# EAGLE board Iridium_9603_Beacon (EAGLE 9.0.0)
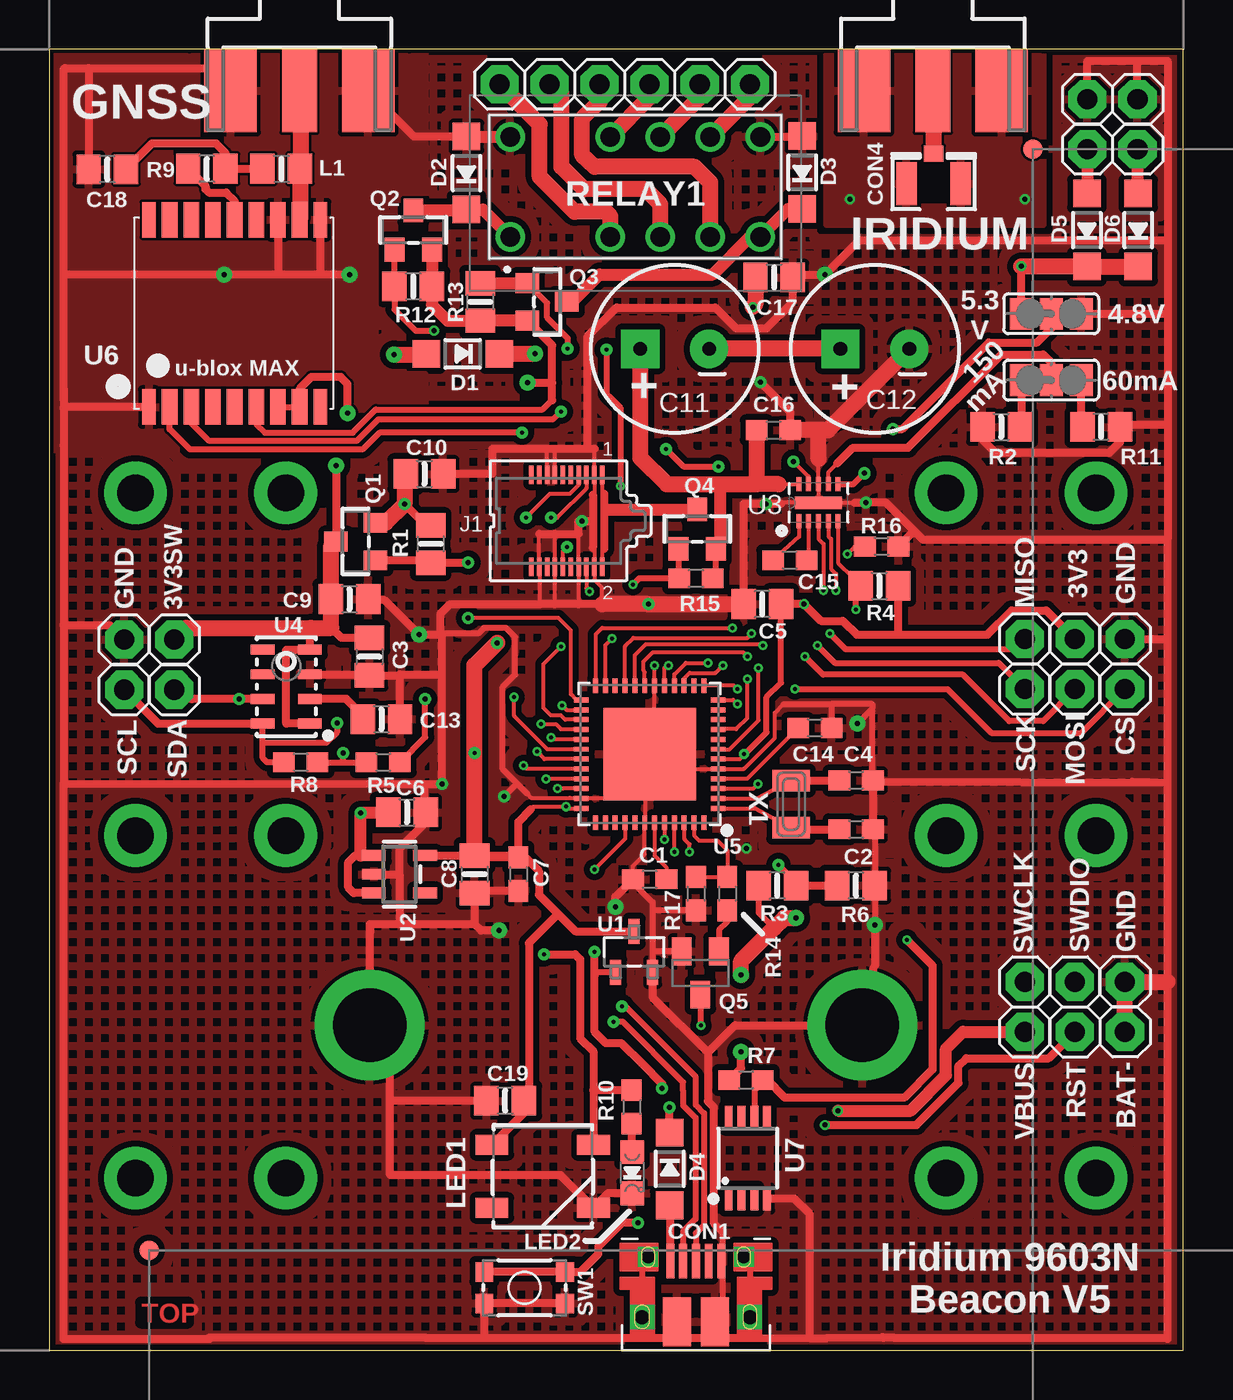
[diagram p0: board, top side]
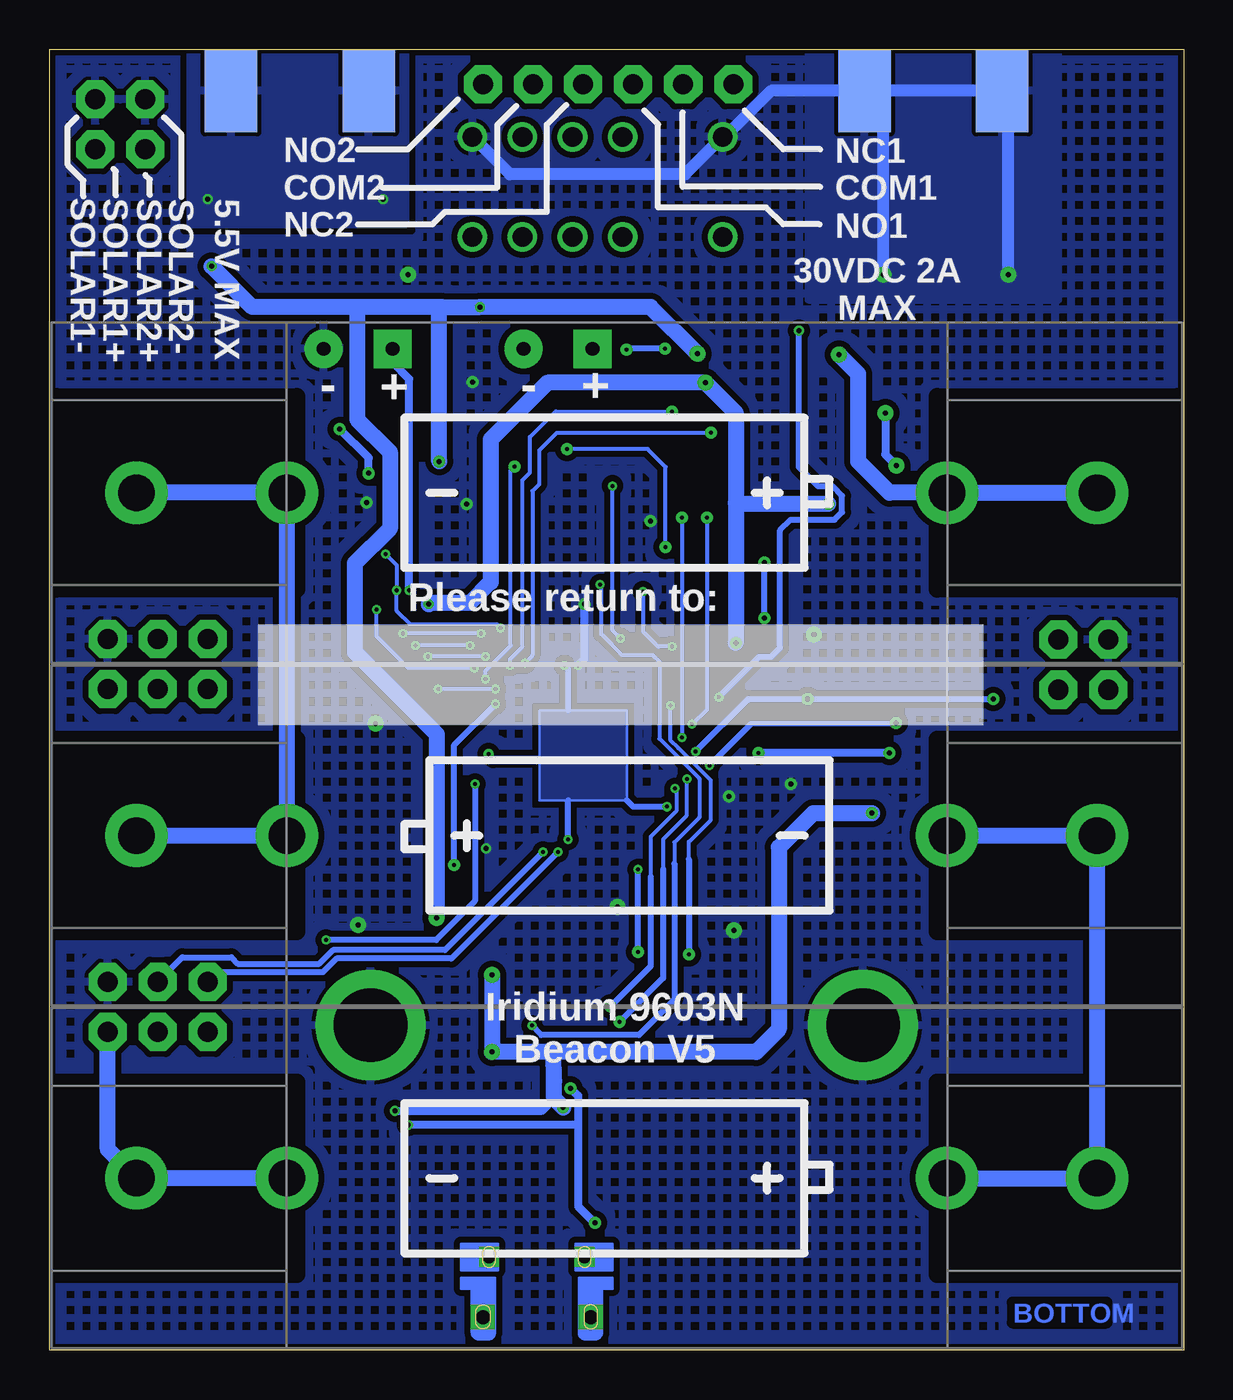
[diagram p1: board, bottom side, seen from below]

Size 57.56 x 66.04 mm. Coordinates in mm from the lower left corner, seen from the top.
Outline: 0,0 57.56,0 57.56,66.04 0,66.04 0,0
Copper layers (1*16): Top 0.018mm / dielectric 1.55mm / Bottom 0.018mm
Design rules "Multi-CB_2L_125um-Tracks_OL35um *": minimum track width 0.125mm, minimum drill 0.2mm, track to track 0.125mm, track to pad 0.125mm, pad to pad 0.125mm, via to via 0.125mm, smd to smd 0mil, copper to edge 0.2mm, drill to drill 0.2mm, minimum pad ring 0.125mm, minimum via ring 0.125mm, stop-mask expansion 2mil, vias tented up to drill 0.45mm, thermal gap 0.2mm

## Footprints (pad centres in the part's own frame; a part is rotated, then mirrored left to right if it is on the bottom)
1X01 = drill 1.016 pad 1.93 octagon: 1 0,0
BATTERY-AAA-KEYSTONE92 = drill 1.854 pad 3.175: GND@1 24.384,0; GND@2 16.764,0; PWR@1 -24.384,0; PWR@2 -16.764,0
0603-NO = smd 1.1 x 1: 1 -0.85,0; 2 0.85,0
0805-NO = smd 1.24 x 1.5: 1 -0.95,0; 2 0.95,0
CPOL-RADIAL-1F-2.7V = drill 0.7 pad 1.93 square: + 1.75,0 | drill 0.7 pad 1.93: - -1.75,0
FCI_10103594 = smd 1.425 x 2.5: BASE@1 -0.963,1.45; BASE@2 0.963,1.45 | smd 0.4 x 1.75: D+ 0,4.525; D- -0.65,4.525; GND 1.3,4.525; ID 0.65,4.525; VBUS -1.3,4.525 | drill 0.7 pad 1.25 square: SPRT@1 -2.736,1.679; SPRT@2 2.736,1.679 | drill 0.65 pad 1.016 square: SPRT@3 -2.426,4.747; SPRT@4 2.426,4.747
U.FL = smd 2.2 x 1.05: 1 0,1.375; 2 0,-1.375 | smd 0.8 x 1: 3 1.525,0
SOD-123 = smd 1.4 x 1.4: A 1.85,0; C -1.85,0
FIDUCIAL-1X2 = smd 1 x 1: 1 0,0
J502-ND-142-0711-821/826 = smd 4.191 x 1.778: 1 2.115,0 | smd 4.191 x 2.667: G@1 2.115,3.495; G@2 2.115,-3.495 | smd 4.191 x 2.667 bottom: G@3 2.115,3.495; G@4 2.115,-3.495
SS4-10-3.50-X-D = smd 0.23 x 0.93: 1 1.8,2.335; 2 1.8,-2.335; 3 1.4,2.335; 4 1.4,-2.335; 5 1,2.335; 6 1,-2.335; 7 0.6,2.335; 8 0.6,-2.335; 9 0.2,2.335; 10 0.2,-2.335; 11 -0.2,2.335; 12 -0.2,-2.335; 13 -0.6,2.335; 14 -0.6,-2.335; 15 -1,2.335; 16 -1,-2.335; 17 -1.4,2.335; 18 -1.4,-2.335; 19 -1.8,2.335; 20 -1.8,-2.335
PAD-JUMPER-3-2OF3_NC_BY_TRACE_YES_SILK_LARGE = smd 1.168 x 1.6: 1 -1.524,0; 2 0,0; 3 1.524,0
WS2812B = smd 1.651 x 1: 1 -2.577,1.6; 2 -2.577,-1.6; 3 2.577,-1.6; 4 2.577,1.6
CHIPLED_0805_NOOUTLINE = smd 1.2 x 1.2: A 0,-1.05; C 0,1.05
SOT23-WIDE = smd 1 x 1.2: 1 -0.95,-1; 2 0.95,-1; 3 0,1
SOT23-BEC = smd 1 x 1.4: B -0.95,-1.1; C 0,1.1; E 0.95,-1.1
G6SK2DC5 = drill 1 pad 1.5: 1 -6.35,-2.54; 3 -1.27,-2.54; 4 1.27,-2.54; 5 3.81,-2.54; 6 6.35,-2.54; 7 6.35,2.54; 8 3.81,2.54; 9 1.27,2.54; 10 -1.27,2.54; 12 -6.35,2.54
STANDOFF-ELECTRICAL-MCMASTER-95117A411 = drill 3.734 pad 5.588: P1 0,0
TACTILE_SWITCH_SMD_4.6X2.8MM = smd 0.9 x 1: 1 -2.05,-0.8; 2 2.05,-0.8; 3 2.05,0.8; 4 -2.05,0.8
SOT95P237X112-3N = smd 0.559 x 1.27: 1 -0.94,-1.041; 2 0.94,-1.041; 3 0,1.041
SOT23-5 = smd 0.55 x 1.2: 1 -0.95,-1.3; 2 0,-1.3; 3 0.95,-1.3; 4 0.95,1.3; 5 -0.95,1.3
DFN300X200-10L = smd 0.711 x 0.254: 1 -0.94,0.991; 2 -0.94,0.508; 3 -0.94,0; 4 -0.94,-0.508; 5 -0.94,-0.991; 6 0.94,-0.991; 7 0.94,-0.508; 8 0.94,0; 9 0.94,0.508; 10 0.94,0.991 | smd 0.635 x 2.388: 11 0,0
LGA8 = smd 1.2 x 0.5: 1 -1.2,1.875; 2 -1.2,0.625; 3 -1.2,-0.625; 4 -1.2,-1.875; 5 1.2,-1.875; 6 1.2,-0.625; 7 1.2,0.625; 8 1.2,1.875
TQFN48_7MM = smd 0.25 x 0.75: 1 -2.75,-3.475; 2 -2.25,-3.475; 3 -1.75,-3.475; 4 -1.25,-3.475; 5 -0.75,-3.475; 6 -0.25,-3.475; 7 0.25,-3.475; 8 0.75,-3.475; 9 1.25,-3.475; 10 1.75,-3.475; 11 2.25,-3.475; 12 2.75,-3.475; 25 2.75,3.475; 26 2.25,3.475; 27 1.75,3.475; 28 1.25,3.475; 29 0.75,3.475; 30 0.25,3.475; 31 -0.25,3.475; 32 -0.75,3.475; 33 -1.25,3.475; 34 -1.75,3.475; 35 -2.25,3.475; 36 -2.75,3.475 | smd 0.75 x 0.25: 13 3.475,-2.75; 14 3.475,-2.25; 15 3.475,-1.75; 16 3.475,-1.25; 17 3.475,-0.75; 18 3.475,-0.25; 19 3.475,0.25; 20 3.475,0.75; 21 3.475,1.25; 22 3.475,1.75; 23 3.475,2.25; 24 3.475,2.75; 37 -3.475,2.75; 38 -3.475,2.25; 39 -3.475,1.75; 40 -3.475,1.25; 41 -3.475,0.75; 42 -3.475,0.25; 43 -3.475,-0.25; 44 -3.475,-0.75; 45 -3.475,-1.25; 46 -3.475,-1.75; 47 -3.475,-2.25; 48 -3.475,-2.75 | smd 4.7 x 4.7: THERMAL 0,0
MAX-M8 = smd 1.8 x 0.7: 1_GND 4.95,-4.4; 9_RESET_N 4.95,4.3; 10_GND -4.55,4.3; 18_SAFEBOOT_N -4.55,-4.4 | smd 1.8 x 0.8: 2_TXD 4.95,-3.35; 3_RXD 4.95,-2.25; 4_TIMEPULSE 4.95,-1.15; 5_EXTINT 4.95,-0.05; 6_V_BCKP 4.95,1.05; 7_VCC_IO 4.95,2.15; 8_VCC 4.95,3.25; 11_RF_IN -4.55,3.25; 12_GND -4.55,2.15; 13_LNA_EN -4.55,1.05; 14_VCC_RF -4.55,-0.05; 15_V_ANT/RESERVED -4.55,-1.15; 16_SDA -4.55,-2.25; 17_SCL -4.55,-3.35
MSOP8 = smd 0.4 x 1.2: 1 -0.975,-2.05; 2 -0.325,-2.05; 3 0.325,-2.05; 4 0.975,-2.05; 5 0.975,2.05; 6 0.325,2.05; 7 -0.325,2.05; 8 -0.975,2.05
XTAL3215 = smd 1.1 x 1.9: P$1 1.2,0; P$2 -1.2,0

## Placement (x,y rotation side)
3V3  [1X01]  52.07,36.1 270 top
3V3SW  [1X01]  6.35,36.07 90 top
BAT1  [BATTERY-AAA-KEYSTONE92]  28.77,43.53 180 bottom
BAT2  [BATTERY-AAA-KEYSTONE92]  28.77,26.13 0 bottom
BAT3  [BATTERY-AAA-KEYSTONE92]  28.77,8.73 180 bottom
BAT-  [1X01]  54.61,16.16 0 top
C1  1uF  [0603-NO]  30.48,23.91 180 top
C2  22pF  [0603-NO]  40.96,26.45 0 top
C3  10uF  [0805-NO]  16.26,35.21 270 top
C4  22pF  [0603-NO]  40.96,28.92 0 top
C5  10uF  [0805-NO]  36.2,37.88 180 top
C6  10µF  [0805-NO]  18.16,27.3 0 top
C7  1uF  [0603-NO]  23.81,24.16 270 top
C8  10µF  [0805-NO]  21.59,24.16 270 top
C9  0.1uF  [0805-NO]  15.24,38.13 0 top
C10  10uF  [0805-NO]  19.05,44.48 0 top
C11  1F 2.7V  [CPOL-RADIAL-1F-2.7V]  31.75,50.83 180 top
C12  1F 2.7V  [CPOL-RADIAL-1F-2.7V]  41.91,50.83 180 top
C13  0.1uF  [0805-NO]  16.86,32.04 0 top
C14  1uF  [0603-NO]  38.86,31.59 0 top
C15  1uF  [0603-NO]  37.59,40.1 0 top
C16  0.22uF  [0603-NO]  36.77,46.7 0 top
C17  2.2uF  [0805-NO]  36.8,54.45 0 top
C18  10nF  [0805-NO]  2.95,59.94 180 top
C19  10uF  [0805-NO]  23.15,12.67 180 top
COM1  [1X01]  25.4,64.26 0 top
COM2  [1X01]  33.02,64.26 0 top
CON1  [FCI_10103594]  32.83,0 0 top
CON4  uFL  [U.FL]  44.89,59.21 90 top
CS  [1X01]  54.61,33.56 90 top
D1  MBR120  [SOD-123]  20.99,50.58 180 top
D2  MBR120  [SOD-123]  21.18,59.75 90 top
D3  MBR120  [SOD-123]  38.23,59.79 90 top
D4  MBR120  [SOD-123]  31.5,9.21 270 top
D5  MBR120  [SOD-123]  52.67,56.86 90 top
D6  MBR120  [SOD-123]  55.28,56.86 90 top
FD1  FIDUCIAL1X2  [FIDUCIAL-1X2]  5.08,5.08 0 top
FD2  FIDUCIAL1X2  [FIDUCIAL-1X2]  49.94,60.96 0 top
GND  [1X01]  54.61,18.7 270 top
GND2  [1X01]  54.61,36.1 270 top
GND3  [1X01]  3.81,36.07 90 top
GNSS  SMA-142-0711-821/826  [J502-ND-142-0711-821/826]  12.7,66.04 270 top
IRIDIUM  SMA-142-0711-821/826  [J502-ND-142-0711-821/826]  44.86,66.04 270 top
J1  SS4-10-3.50-X-D  [SS4-10-3.50-X-D]  26.27,42.1 0 top
JP1  [PAD-JUMPER-3-2OF3_NC_BY_TRACE_YES_SILK_LARGE]  50.86,52.61 180 top
JP2  [PAD-JUMPER-3-2OF3_NC_BY_TRACE_YES_SILK_LARGE]  50.86,49.24 180 top
L1  33nH  [0805-NO]  11.78,59.98 0 top
LED1  [WS2812B]  25.05,8.83 0 top
LED2  RED  [CHIPLED_0805_NOOUTLINE]  29.59,9.02 180 top
MISO  [1X01]  49.53,36.1 270 top
MOSI  [1X01]  52.07,33.56 90 top
NC1  [1X01]  22.86,64.26 0 top
NC2  [1X01]  30.48,64.26 0 top
NO1  [1X01]  27.94,64.26 0 top
NO2  [1X01]  35.56,64.26 0 top
Q1  DMG3415U-7  [SOT23-WIDE]  15.56,41.05 90 top
Q2  DMG3415U-7  [SOT23-WIDE]  18.48,56.86 0 top
Q3  DMG3415U-7  [SOT23-WIDE]  25.27,53.21 270 top
Q4  DMG3415U-7  [SOT23-WIDE]  32.89,41.69 0 top
Q5  2N2222  [SOT23-BEC]  33.05,19.15 180 top
R1  100K  [0805-NO]  19.37,40.93 270 top
R2  12K  [0805-NO]  48.32,46.86 0 top
R3  100K  [0805-NO]  36.96,23.59 180 top
R4  100K  [0805-NO]  42.13,38.8 0 top
R5  1K  [0603-NO]  16.95,29.84 0 top
R6  100K  [0805-NO]  40.96,23.59 180 top
R7  47k  [0603-NO]  35.37,13.72 0 top
R8  1K  [0603-NO]  12.76,29.84 180 top
R9  10 ohm  [0805-NO]  8,59.98 180 top
R10  2.2K  [0603-NO]  29.56,12.35 270 top
R11  30K  [0805-NO]  53.4,46.86 180 top
R12  100K  [0805-NO]  18.48,54.01 0 top
R13  100K  [0805-NO]  21.88,53.21 270 top
R14  1K  [0603-NO]  34.42,23.18 270 top
R15  10K  [0603-NO]  32.83,39.18 180 top
R16  10K  [0603-NO]  42.26,40.8 0 top
R17  10K  [0603-NO]  32.83,23.18 270 top
RELAY1  G6SK-2_DC5  [G6SK2DC5]  29.75,59.05 0 top
RST  [1X01]  52.07,16.16 90 top
S1  STANDOFF_ELECTRICALMCMASTER-95117A411  [STANDOFF-ELECTRICAL-MCMASTER-95117A411]  16.27,16.5 0 top
S2  STANDOFF_ELECTRICALMCMASTER-95117A411  [STANDOFF-ELECTRICAL-MCMASTER-95117A411]  41.27,16.5 0 top
SCK  [1X01]  49.53,33.56 90 top
SCL  [1X01]  3.81,33.53 270 top
SDA  [1X01]  6.35,33.53 270 top
SOLAR1+  [1X01]  55.24,60.96 0 top
SOLAR1-  [1X01]  55.24,63.5 0 top
SOLAR2+  [1X01]  52.7,60.96 0 top
SOLAR2-  [1X01]  52.7,63.5 0 top
SW1  [TACTILE_SWITCH_SMD_4.6X2.8MM]  24.13,3.17 180 top
SWCLK  [1X01]  49.53,18.7 90 top
SWDIO  [1X01]  52.07,18.7 90 top
U1  MCP111T-240E/TT  [SOT95P237X112-3N]  29.69,20.22 0 top
U2  SPX3819-3.3  [SOT23-5]  17.78,24.16 270 top
U3  LTC3225EDDB#TRMPBF  [DFN300X200-10L]  39.05,43.02 90 top
U4  MPL3115A2LGA8  [LGA8]  12.03,33.69 180 top
U5  ATSAMD21G18_QFN  [TQFN48_7MM]  30.48,30.26 90 top
U6  MAX-M8  [MAX-M8]  9.46,52.83 270 top
U7  LT1634-1,25BMCMS8  [MSOP8]  35.46,9.75 0 top
VBUS  [1X01]  49.53,16.16 90 top
X1  32.768  [XTAL3215]  37.66,27.72 270 top

## Library data of the parts
3V3 3V3SW BAT- COM1 COM2 CS GND GND2 GND3 MISO MOSI NC1 NC2 NO1 NO2 RST SCK SCL SDA SOLAR1+ SOLAR1- SOLAR2+ SOLAR2- SWCLK SWDIO VBUS = adafruit
BAT1-BAT3 S1 S2 = SparkFun-Electromechanical
C1-C10 C13-C19 CON1 CON4 D1-D6 L1 LED2 Q1-Q4 R1-R17 U2 U5 = microbuilder
C11 C12 = SparkFun-Capacitors
FD1 FD2 = SparkFun-Aesthetics
GNSS IRIDIUM = con-coax; MF: JOHNSON COMPONENTS; MPN: 142-0711-821; OC_FARNELL: 1019328; OC_NEWARK: 16F3627
J1 = SS4-10-3.50-X-D
JP1 JP2 = SparkFun-Passives
LED1 = SparkFun-LED; PROD_ID: DIO-12503
Q5 = transistor
RELAY1 = G6SK-2_DC5; DESCRIPTION: RELAY TELECOM DPDT 2A 5V; HEIGHT: 9mm; MANUFACTURER_NAME: Omron Electronics; MANUFACTURER_PART_NUMBER: G6SK-2 DC5
SW1 = SparkFun-Electromechanical; PROD_ID: SWCH-13065
U1 = Microchip-MCP11; MPN: MCP111T-240E/TT; OC_FARNELL: 1851877; OC_NEWARK: 56J7328; PACKAGE: SOT23-3; SUPPLIER: MICROCHIP
U3 = LTC_By_element14_Batch_1
U4 = SparkFun-Sensors; PROD_ID: IC-10869
U6 = ubloxLib
U7 = linear-technology
X1 = adafruit2

## Nets
3V3SW: 3V3SW.1 C3.1 C9.1 Q1.3 U4.1 U4.4 U6.7_VCC_IO U6.8_VCC
9_V_RESET_N: U6.9_RESET_N
!RESET: RST.1 SW1.1 SW1.2 U1.1 U5.40
+3V3: 3V3.1 C5.1 C7.1 C8.1 C10.1 C19.1 LED1.1 Q1.2 Q2.2 Q3.2 R1.1 R4.2 R5.1 R8.1 R12.2 R13.2 U1.3 U2.5 U5.6 U5.17 U5.36 U5.44 U6.6_V_BCKP
A0: R7.2 U5.3 U7.6
A1: R4.1 U3.5 U5.7
A2: U5.8
A3: J1.12 U5.9
A4: U5.10
A5: R14.1 R17.1 U5.47
AREF: C14.1 U5.4
D0: U5.16 U6.2_TXD
D1: U5.15 U6.3_RXD
D2: Q3.1 R13.1 U5.23
D3: U5.14
D5: R16.1 U3.4 U5.24
D6: J1.5 U5.29
D7: Q2.1 R12.1 U5.30
D8: U5.11
D9: R3.1 R6.2 U5.12
D10: J1.6 U5.27
D11: Q1.1 R1.2 U5.25
D12: J1.7 U5.28
D13: LED1.4 R10.1 U5.26
D+: CON1.D+ U5.34
D-: CON1.D- U5.33
EXT_PWR: J1.1 J1.2 Q4.3
GND: C1.2 C2.2 C3.2 C4.2 C5.2 C6.2 C7.2 C8.2 C9.2 C10.2 C12.- C13.2 C14.2 C16.2 C17.2 C18.2 C19.2 CON1.BASE@1 CON1.BASE@2 CON1.GND CON1.SPRT@1 CON1.SPRT@2 CON1.SPRT@3 CON1.SPRT@4 D2.A D3.A GND2.1 GND3.1 GND.1 GNSS.G@1 GNSS.G@2 GNSS.G@3 GNSS.G@4 J1.3 J1.4 J1.8 J1.13 J1.14 J1.15 J1.18 JP1.1 LED1.3 LED2.C Q5.E R2.1 R6.1 R11.1 R16.2 R17.2 RELAY1.7 RELAY1.12 S1.P1 S2.P1 SOLAR1-.1 SOLAR2-.1 SW1.3 SW1.4 U1.2 U2.2 U3.8 U3.11 U4.3 U5.5 U5.18 U5.35 U5.42 U5.THERMAL U6.1_GND U6.10_GND U6.12_GND U7.4
GNDA: CON4.1 CON4.2 IRIDIUM.G@1 IRIDIUM.G@2 IRIDIUM.G@3 IRIDIUM.G@4
GPS_ANT: GNSS.1 L1.2 U6.11_RF_IN
LTC3225_VOUT: C11.+ C16.1 Q4.2 R15.1 U3.10
MISO: MISO.1 U5.21
MOSI: MOSI.1 U5.19
N$1: C18.1 L1.1 R9.1
N$2: CON4.3 IRIDIUM.1
N$3: LED2.A R10.2
N$4: D6.A SOLAR1+.1
N$5: C2.1 U5.1 X1.P$1
N$6: C11.- C12.+ U3.3
N$7: C4.1 U5.2 X1.P$2
N$8: BAT1.GND@1 BAT1.GND@2 BAT2.PWR@1 BAT2.PWR@2
N$9: C15.2 U3.2
N$10: C15.1 U3.1
N$11: JP2.2 U3.7
N$12: C13.1 U4.2
N$13: JP1.2 U3.6
N$14: D5.A SOLAR2+.1
N$15: BAT3.GND@1 BAT3.GND@2 BAT-.1
N$16: CON1.VBUS D4.A
N$17: JP2.3 R2.2
N$18: JP2.1 R11.2
N$19: Q4.1 Q5.C R15.2
N$20: Q5.B R14.2
N$21: BAT2.GND@1 BAT2.GND@2 BAT3.PWR@1 BAT3.PWR@2
N$23: NC1.1 RELAY1.3
N$24: COM1.1 RELAY1.4
N$25: NO1.1 RELAY1.5
N$26: NO2.1 RELAY1.8
N$27: COM2.1 RELAY1.9
N$28: NC2.1 RELAY1.10
RESET_RELAY: D3.C Q3.3 RELAY1.6
SCK: SCK.1 U5.20
SCL: R8.2 SCL.1 U4.8 U5.32
SD_CS: CS.1 U5.13
SDA: R5.2 SDA.1 U4.7 U5.31
SET_RELAY: D2.C Q2.3 RELAY1.1
SWCLK: SWCLK.1 U5.45
SWDIO: SWDIO.1 U5.46
VBAT: BAT1.PWR@1 BAT1.PWR@2 D1.A
VBUS: C6.1 C17.1 D1.C D4.C D5.C D6.C JP1.3 R3.2 R7.1 U2.1 U2.3 U3.9 VBUS.1
VCC_RF: R9.2 U6.14_VCC_RF
VDDCORE1: C1.1 U5.43

## Tracks (layer width: path | path; a pad name or v marks a point on that pad's centre or on a via)
3V3SW  (via drill 0.25 pad 0.81)
  Top 0.305: U6.7_VCC_IO U6.8_VCC
  Top 0.406: U4.1 12.03,31.81 12.03,35.56 U4.4 13.23,36.63 13.27,36.67 | C9.1 14.54,38.13 | v15.14,47.56 15.14,49.05 14.8,49.4 13.3,49.4 12.71,48.81 U6.8_VCC | v14.57,44.9 14.57,41.07 Q1.3 | C3.1 14.83,36.16 14.32,36.67
  Top 0.813: 14.24,38.18 C9.1 | Q1.3 14.29,40.78 C9.1 | 3V3SW.1 6.95,36.67 13.27,36.67 14.32,36.67 14.32,38.1 C9.1
  Bottom 0.406: v15.14,47.56 15.14,45.47 v14.57,44.9
!RESET  (via drill 0.2 pad 0.46, 0.2 pad 0.61, 0.25, 0.25 pad 0.61)
  Top 0.203: U5.40 29.23,25.96 v27.69,24.42
  Top 0.305: U1.1 27.82,19.18 27.69,19.05
  Top 0.406: SW1.2 SW1.1 26.96,3.98 27.88,4.89 27.88,5.27 29.08,6.48 v29.88,6.48 | 27.65,20.19 v27.69,20.23 27.69,19.05 27.69,16.16 28.26,15.59 29.05,15.59 30.09,14.56 31.11,13.53 v31.11,13.3 | v39.37,11.43 44.02,11.43 46.16,13.57 46.16,14.44 46.55,14.83 50.74,14.83 RST.1
  Bottom 0.305: v27.69,20.23 v27.69,24.42
  Bottom 0.406: v31.11,13.3 30.73,12.92 30.73,11.43 | 30.73,11.43 30.73,7.3 29.91,6.48 v29.88,6.48 | 30.73,11.43 v39.37,11.43
+3V3  (via drill 0.2 pad 0.46, 0.2 pad 0.51, 0.2 pad 0.61, 0.25 pad 0.41, 0.25 pad 0.61, 0.25 pad 0.81)
  Top 0.127: U5.36 26.96,27.46 | U5.44 31.24,26.77 | 24.45,27.46 24.57,27.59
  Top 0.203: U5.17 31.23,34.63 v31.43,34.77 | 31.24,26.77 v31.24,25.94 | 24.57,27.59 v26.23,27.59 26.31,27.51 U5.36 | C5.1 | U5.6 35.06,30.01 35.27,30.23 v35.27,30.26
  Top 0.305: C5.1 37.15,33.88 36.42,33.15 36.42,31.37 35.31,30.26 v35.27,30.26 | R5.1 R8.1 14.92,29.84 v14.92,30.32 | U6.6_V_BCKP 10.51,47.02 10.95,46.58 15.4,46.58 16.57,47.75 25.05,47.75 25.53,48.23
  Top 0.406: 24.45,27.46 23.81,26.83 C7.1 21.59,25.01 C8.1 U2.5 24.07,25.11 24.86,24.32 24.86,23.11 25.83,22.15 | 38.26,37.88 C5.1 | 25.83,22.15 26.71,21.27 U1.3 | 25.83,22.15 24.35,20.67 24.35,12.93 C19.1 24.1,12.05 LED1.1 | Q3.2 25.53,51.01 25.53,49.12 | R1.1 19.12,41.88 v18.03,42.96 | v38.32,37.88 39.17,37.02 40.29,37.02 40.99,36.32 43.18,36.32 | 3V3.1 50.61,37.56 48.86,37.56 47.62,36.32 43.18,36.32 | v24.28,49.12 25.53,49.12 | 25.53,48.23 25.53,49.12 | R4.2 43.08,36.42 43.18,36.32
  Top 0.61: Q2.2 R12.2 19.43,53.06 20.22,52.26 R13.2 Q3.2
  Top 0.813: C8.1 v21.59,30.32 21.59,34.77 v22.73,35.91 | Q1.2 17.08,42 v18.03,42.96 18.03,44.42 C10.1
  Bottom 0.127: 31.23,32.48 28.26,32.48 28.26,27.91 31.24,27.91 32.7,27.91 32.7,30 32.7,32.48 31.24,32.48 31.23,32.48 | 31.23,32.48 U5.17
  Bottom 0.305: 32.7,30 35.05,30 35.27,30.23 v35.27,30.26 | v31.24,25.94 31.24,27.91 | 28.26,27.91 27.94,27.59 v26.23,27.59 | v31.43,34.77 31.24,34.58 31.24,32.48
  Bottom 0.406: v14.92,30.32 v21.59,30.32
  Bottom 0.813: v38.32,37.88 38.26,37.94 36.23,37.94 35.18,38.99 35.18,46.23 32.29,49.12 v24.28,49.12 22.73,47.57 22.73,43.02 | 22.73,43.02 v22.73,35.91 | 22.73,43.02 22.67,42.96 v18.03,42.96
  pour Bottom: 28.26,32.48 32.7,32.48 32.7,27.91 28.26,27.91
A0  (via drill 0.2 pad 0.46)
  Top 0.125: 35.8,11.82 U7.6 | 36.17,13.57 R7.2
  Top 0.203: U5.3 35.75,28.51 v35.97,28.73
  Top 0.305: 36.45,13.72 R7.2 | 35.8,11.82 35.8,13.19 36.17,13.57
  Top 0.406: 36.45,13.72 37.34,12.82 43.41,12.82 44.84,14.26 44.83,19.53 v43.53,20.83
  Bottom 0.305: v35.97,28.73 35.97,22.8 37.94,20.83 v43.53,20.83
A1  (via drill 0.2 pad 0.46)
  Top 0.203: U3.5 40.04,39.97 40.77,39.24 40.96,39.24 41.18,39.02 R4.1 | U5.7 34.54,30.51 36.01,31.97 v36.01,34.64
  Top 0.305: v40.96,37.59 40.96,38.57 R4.1
  Bottom 0.203: v36.01,34.64 39.37,34.64 40.96,36.23 v40.96,37.59
A3  (via drill 0.2 pad 0.46, 0.2 pad 0.61)
  Top 0.127: 33.98,31.53 U5.9
  Top 0.203: 33.98,31.53 34.86,31.53 35.43,32.1 v35.43,34.07 | J1.12 26.07,40.55 v26.29,40.77
  Top 0.305: v31.3,45.75 32.19,44.86 v33.97,44.86
  Bottom 0.203: v31.3,45.75 27.21,45.75 26.29,44.83 v26.29,40.77 | v35.43,34.07 35.43,34.51 34.16,35.78 34.16,44.67 v33.97,44.86
A5
  Top 0.203: U5.47 32.73,26.13 32.99,25.88 33.91,25.88 34.42,25.37 R14.1 R17.1
AREF
  Top 0.203: U5.4 35.43,29.01 C14.1
D0  (via drill 0.2 pad 0.46, 0.2 pad 0.61)
  Top 0.203: U5.16 31.73,34.3 32.32,34.89 v33.43,34.89
  Top 0.305: v24,46.58 16.76,46.58 15.91,45.72 7.14,45.72 6.11,46.75 U6.2_TXD
  Bottom 0.203: v24,46.58 31.81,46.58 32.7,45.69 32.7,43.97 33.05,43.62 33.05,35.27 v33.43,34.89
D1  (via drill 0.2 pad 0.46, 0.2 pad 0.61)
  Top 0.127: 32.23,34.1 U5.15
  Top 0.203: 32.23,34.1 32.51,34.38 33.81,34.38 v34.2,34.77
  Top 0.305: U6.3_RXD 7.21,47.07 8.13,46.15 15.61,46.15 16.7,47.24 25.56,47.24 v25.97,47.66
  Bottom 0.203: v25.97,47.66 31.88,47.66 33.18,46.35 33.18,44.55 33.56,44.16 33.56,35.72 34.2,35.08 v34.2,34.77
D2  (via drill 0.2 pad 0.46, 0.2 pad 0.61)
  Top 0.203: U5.23 28.23,35.79 v28.57,36.13
  Top 0.305: Q3.1 25.27,53.16 25.27,52.42 26.32,51.37 v26.32,50.83 | v28.29,50.8 28.29,48.55 28.48,48.35 28.99,47.85 v28.99,43.88
  Top 0.61: R13.1 Q3.1
  Bottom 0.203: v28.57,36.13 28.99,36.54 v28.99,43.88
  Bottom 0.305: v26.32,50.83 28.26,50.83 v28.29,50.8
D5  (via drill 0.2 pad 0.46)
  Top 0.127: 27.75,33.75 U5.24
  Top 0.203: U3.4 39.56,41.31 39.69,41.18 39.69,39.66 39.94,39.4 v39.94,38.58 | 27.75,33.75 27.75,36.35 28.07,36.67 v34.67,36.67 | R16.1 40.89,40.8 v40.51,40.42
  Bottom 0.203: v40.51,40.42 39.94,39.85 v39.94,38.58 39.94,37.53 39.27,36.86 34.86,36.86 v34.67,36.67
D6  (via drill 0.2 pad 0.46, 0.2 pad 0.61)
  Top 0.127: U5.29
  Top 0.203: J1.5 27.27,43.75 25.78,42.26 v25.46,42.26 | U5.29 25.57,31.01 v25.46,31.11
  Bottom 0.203: v25.46,42.26 v25.46,31.11
D7  (via drill 0.2 pad 0.46, 0.25)
  Top 0.203: U5.30 25.29,30.51 23.6,32.2 v23.6,33.15
  Top 0.305: Q2.1 R12.1 17.53,52.83 18.61,51.75 v19.53,51.75
  Bottom 0.305: v23.6,33.15 21.53,35.21 20.92,35.21 20.48,35.66 20.48,41.62 19.94,42.16 17.72,42.16 17.34,42.55 17.34,43.37 17.81,43.85 18.54,43.85 19.53,44.83 v19.53,51.75
D9  (via drill 0.2 pad 0.46, 0.2 pad 0.61)
  Top 0.203: U5.12 34.72,33.01 v34.92,32.8
  Top 0.305: 37.91,23.97 R3.1 37.91,23.75 v37.02,24.64
  Top 0.406: R3.1 R6.2
  Bottom 0.305: v37.02,24.64 37.02,30.73 v34.92,32.8
D10  (via drill 0.2 pad 0.46)
  Top 0.127: 25.84,35.59 v25.97,35.72
  Top 0.203: U5.27 26.19,32.01 25.97,32.23 25.46,32.23 25.08,32.61 25.08,34.83 v25.97,35.72 | J1.6 27.27,38.67 v27.43,38.51
  Bottom 0.203: v25.97,35.72 26.67,35.72 27.43,36.48 v27.43,38.51
D11  (via drill 0.25 pad 0.61)
  Top 0.127: U5.25 26.78,33.01
  Top 0.203: 26.78,33.01 26.48,33.31 26.48,36.54 25.84,37.18 v21.27,37.18
  Top 0.406: Q1.1 19.24,40.1 R1.2 v21.27,39.98 v21.27,39.97
  Bottom 0.305: v21.27,37.18 v21.27,39.97
D12  (via drill 0.2 pad 0.46, 0.2 pad 0.61)
  Top 0.127: 26.98,31.53 U5.28
  Top 0.203: v24.96,31.78 25.72,31.78 25.97,31.53 26.98,31.53 | J1.7 26.87,43.92 26.42,43.47 25.4,43.47 v24.19,42.26
  Bottom 0.203: v24.19,42.26 24.19,32.51 24.92,31.78 v24.96,31.78
D13  (via drill 0.2 pad 0.46, 0.2 pad 0.61)
  Top 0.203: v26.04,32.73 26.26,32.51 U5.26
  Top 0.406: 27.63,13.21 LED1.4 | R10.1 27.64,13.2 27.63,13.21 | v25.11,20.1 26.7,20.1 26.96,19.84 26.96,15.84 27.63,15.17 27.63,13.21
  Bottom 0.203: 25.11,24.92 25.11,25.81 24,26.92 24,28.92 25.64,30.57 25.65,30.57 26.04,30.95 v26.04,32.73
  Bottom 0.305: 25.11,24.92 v25.11,20.1
D+  (via drill 0.2 pad 0.46, 0.2 pad 0.61)
  Top 0.203: U5.34 26.06,28.51 v25.81,28.51
  Top 0.305: CON1.D+ 32.83,5.94 33.24,6.35 33.24,12.04 32.83,12.45 32.83,13.88 29.24,17.46 v29.08,17.46
  Bottom 0.203: 27.05,24.04 27.05,26.07 25.72,27.4 25.72,28.42 v25.81,28.51
  Bottom 0.305: v29.08,17.46 27.05,19.49 27.05,24.04
D-  (via drill 0.2 pad 0.46, 0.2 pad 0.61)
  Top 0.203: U5.33 25.61,29.01 v25.21,28.99
  Top 0.305: CON1.D- 32.18,6.04 32.81,6.67 32.81,11.8 32.18,12.43 32.18,12.7 32.18,13.16 32.18,13.6 29.11,16.67 v28.64,16.67
  Bottom 0.203: 26.42,24.42 26.42,25.94 25.24,27.11 25.24,28.96 v25.21,28.99
  Bottom 0.305: 26.42,24.42 26.42,18.89 v28.64,16.67
EXT_PWR
  Top 0.203: J1.1 28.07,43.52 28.14,43.48 | 28.14,43.48 | 28.14,43.48 28.16,43.47 | 28.16,40.67 28.07,40.61 J1.2
  Top 0.406: 28.16,42.67 28.16,40.67 | 28.16,43.47 28.16,42.67 | 28.38,42.67 28.16,42.67 | 32.64,42.67 Q4.3
  Top 0.61: 28.38,42.67 32.64,42.67
GND  (via drill 0.2 pad 0.46, 0.25, 0.25 pad 0.61, 0.25 pad 0.81)
  Top 0.127: U5.THERMAL 28.23,28.01 | U5.THERMAL 30.23,30.01 | U5.THERMAL 31.23,29.51 | U5.THERMAL 30.73,30.51 | U5.18 | 16.19,38.07 C9.2 | U5.42 | C4.2 41.78,28.92 | J1.15 | J1.18 24.89,39.77 | J1.8 | 37.15,43.02 37.15,42.96
  Top 0.203: 28.23,28.01 U5.35 26.97,28.04 26.42,28.04 26.41,28.05 24.47,28.05 24.26,28.26 | 30.23,30.01 U5.42 | 31.23,29.51 U5.5 35.26,29.51 36.83,31.08 36.83,32.35 37.27,32.8 | 30.73,30.51 U5.18 | C1.2 29.63,24.58 30.23,25.18 U5.42 | J1.15 25.27,45.75 | 27.69,44.44 27.69,45.75 | 24.89,39.77 24.89,37.88 | U3.11 U3.8 39.05,45.24 | U3.11 40.89,43.02 | U3.11 37.15,43.02 | J1.8 26.87,41.43 | U5.18 v30.73,34.77 | J1.8 26.86,37.88 26.86,37.81 | J1.14 25.65,39.75 25.65,37.88 | J1.14 25.65,39.78 | J1.13 25.67,45.67 25.59,45.75 | J1.18 24.87,41.43 | J1.14 25.67,41.43 | J1.3 27.67,43.51 27.59,43.43 | 27.59,40.73 27.67,40.66 J1.4 27.67,39.1 28.04,38.73 28.04,37.91 28.07,37.88
  Top 0.305: 39.71,32.8 C14.2 | 41.78,28.92 41.78,32.58 | 39.71,32.8 41.78,32.8 41.78,32.58 | 37.27,32.8 39.71,32.8 | 34.16,6.03 34.16,4.56 CON1.GND 34.16,4.53 34.16,2.1 33.79,2.1 CON1.BASE@2 | CON1.SPRT@3 30.09,4.75 CON1.SPRT@1 30.16,1.68 30.16,0.64 | CON1.SPRT@4 35.56,4.75 CON1.SPRT@2 35.24,1.68 35.24,0.64 | 23.72,28.8 23.02,29.5 23.02,33.66 23.65,34.29 23.65,36.2 23.18,36.67 22.07,36.67 21.78,36.39 19.94,36.39 | 23.72,28.8 24.26,28.26 | 29.54,23.82 30.63,22.73 30.63,22.29 | 30.63,22.29 30.63,20.32 | 30.63,20.32 U1.2 | 41.78,32.58 v41.02,31.81 | v41.91,21.59 R6.1 41.91,26.35 C2.2 | Q5.E 30.7,20.25 30.63,20.32 | R17.2 30.66,22.33 30.63,22.29 | v23.08,28.1 23.72,28.73 23.72,28.8
  Top 0.406: 56.77,56.36 56.77,65.44 55.24,65.44 | 56.77,56.36 56.77,52.61 | 56.77,52.61 56.77,46.99 | 56.77,46.99 56.77,41.18 | 42.35,0.63 42.86,0.64 56.71,0.64 56.77,0.57 56.77,18.7 56.77,28.83 | 42.35,0.63 39.43,0.6 38.61,0.61 | 0.73,48.83 0.73,48.26 | 0.73,48.26 0.73,47.85 | 0.73,47.85 0.72,45.94 0.73,36.8 | 0.73,36.8 0.73,28.77 | 19.05,0.64 22.13,0.64 | 22.13,0.64 30.16,0.64 31.75,0.64 | 31.75,0.64 35.24,0.64 38.61,0.61 | U2.2 17.78,24.16 | 17.78,24.16 17.78,21.62 | 17.78,21.62 16.27,21.62 | 16.27,21.62 16.29,21.24 | 16.27,21.62 S1.P1 17.3,15.47 17.3,12.7 | C7.2 21.59,23.31 C8.2 21.59,21.62 | 21.59,21.62 17.78,21.62 | C9.2 16.26,38.13 | C2.2 C4.2 41.87,28.86 56.77,28.83 | C5.2 | C5.2 v30.42,37.88 | 27.69,45.75 27.34,45.75 | 27.34,45.75 25.59,45.75 25.27,45.75 22.48,45.75 22.48,44.48 C10.2 | 40.89,43.02 v41.47,43.02 42.48,43.02 44.02,41.48 | 37.15,42.96 v36.39,42.96 35.24,42.96 C5.2 | 29.54,23.82 C1.2 28.73,23.01 v28.73,22.51 | SW1.4 SW1.3 22.08,0.69 22.13,0.64 | 19.94,34.31 19.94,36.39 | 17.8,34.31 19.94,34.31 | 0.73,28.77 17.75,28.73 19.05,28.73 | v22.83,21.3 21.91,21.3 21.59,21.62 | 54.96,28.86 56.77,28.83 | GND3.1 3.08,36.8 0.73,36.8 | 0.73,48.26 0.73,54.61 | 0.73,54.61 0.73,65.02 0.79,65.09 2,65.09 | 2,65.09 C18.2 | 17.3,12.7 17.3,8.89 25.96,8.89 LED1.3 28.37,7.97 LED2.C | 19.07,0.65 19.05,0.64 | 38.61,0.61 38.61,6.92 37.83,7.7 U7.4 | CON1.BASE@1 31.75,1.33 31.75,0.64 | C2.2 41.85,26.41 | v41.91,21.59 41.91,19.49 41.85,19.43 41.85,17.08 S2.P1 34.82,16.5 33.43,15.11 | 42.32,0.67 42.35,0.63 | U4.3 16.2,34.31 C3.2 17.75,34.26 17.8,34.31 | U6.1_GND 0.76,47.88 0.73,47.85 | 2,65.09 8.04,65.09 GNSS.G@2 | 0.73,54.61 v8.89,54.61 11.59,54.61
  Top 0.406: v15.24,54.61 13.75,54.61 | 13.75,54.61 11.59,54.61 | U6.12_GND 11.61,54.63 11.59,54.61 | U6.10_GND 13.76,54.62 13.75,54.61 | 56.77,28.83 56.77,36.07 | 56.77,36.07 56.77,41.18 | 41.84,26.42 C2.2 | GND2.1 56.74,36.1 56.77,36.07 | 19.05,28.73 v19.94,28.73 19.94,34.31 | 56.77,41.18 56.74,41.15 44.35,41.15 44.02,41.48 | C19.2 17.34,12.67 17.3,12.7 | 33.43,15.11 33.43,12.64 33.72,12.35 33.72,6.48 34.16,6.03 | 56.77,46.99 54.48,46.99 R11.1 54.35,46.1 53.82,45.56 48.04,45.56 47.37,46.23 R2.1 | 17.78,24.16 17.78,25.46 19.11,26.79 C6.2 19.05,27.37 19.05,28.73 | C13.2 17.81,34.31 17.8,34.31 | RELAY1.7 38.19,61.59 D3.A | 55.24,65.44 52.7,65.44 SOLAR2-.1 | SOLAR1-.1 55.24,65.44 | JP1.1 56.77,52.61 | 56.77,56.36 41.12,56.36 v39.37,54.61 37.91,54.61 C17.2 37.75,53.21 36.42,51.88 34.86,51.88 33.81,52.93 28.8,52.93 27.34,51.47 27.34,45.75 | U1.2 30.63,17.92 33.43,15.11 | R16.2 43.79,41.48 44.02,41.48 | 24.87,41.43 25.67,41.43 26.87,41.43 26.87,42.1 v27.05,42.1 27.59,42.1 | 28.07,37.88 26.86,37.88 25.65,37.88 24.89,37.88 20.35,37.88 19.88,37.4 19.88,36.32 v18.76,36.32 17.02,38.07 16.19,38.07 | 27.59,43.43 27.59,42.1 | 27.59,42.1 27.59,40.73 | C16.2 37.62,47.63 v36.1,49.15 | D2.A 18.52,61.6 GNSS.G@3 | 0.73,28.77 0.73,0.56 8.14,0.56 8.14,0.64 19.05,0.64
  Top 0.61: D2.A RELAY1.12
  Top 0.813: 39.05,45.24 39.05,46.7 | 39.05,46.7 C16.2 | C5.2 v30.42,37.88 28.07,37.88 | C12.- 39.53,46.7 39.05,46.7 | GND.1 56.77,18.7
  Bottom 0.406: v30.73,34.77 30.42,35.08 v30.42,37.88
  Bottom 0.61: GNSS.G@3 GNSS.G@2 8.89,63.61 v8.89,54.61 | GNSS.G@3 20.94,63.92 23.27,61.59 RELAY1.12 25.3,59.69 34.2,59.69 RELAY1.7 | v15.24,54.61 15.24,62.97 GNSS.G@3
  other vias: 35.4,25.46
  pour Bottom (isolate 0.305, rank 2, hatched): 0,0 0,66.04 57.56,66.04 57.56,0
  pour Top (isolate 0.305, rank 2, hatched): 0,0 0,66.04 57.56,66.04 57.56,0
  pour Top (isolate 0.102): 0,66.04 19.05,66.04 19.05,58.42 16.51,58.42 16.51,49.53 19.05,49.53 19.05,45.72 0,45.72
  pour Bottom (isolate 0.102): 6.35,66.04 19.05,66.04 19.05,53.34 6.35,53.34
GNDA  (via drill 0.25)
  other vias: 40.64,58.42 49.53,58.42
  pour Bottom (isolate 0.102): 39.5,66.04 50.42,66.04 50.42,57.15 39.5,57.15
  pour Top (isolate 0.102): 39.5,66.04 50.42,66.04 50.42,57.15 39.5,57.15
GPS_ANT
  Top 0.125: 12.75,60.12 L1.2 | 12.75,63.88 GNSS.1
  Top 0.406: 12.73,57.4 U6.11_RF_IN
  Top 0.813: L1.2 12.73,57.4 | 12.75,63.88 12.75,60.12
LTC3225_VOUT
  Top 0.127: 37.02,43.97 37.03,43.96
  Top 0.203: 37.03,43.96 U3.10
  Top 0.305: R15.1 33.84,39.34 Q4.2
  Top 0.61: 33.78,40.88 Q4.2 34.04,40.88 34.04,43.96
  Top 0.813: 29.97,50.83 C11.+ 30,45.31 31.35,43.96 34.04,43.96 35.92,43.96 | 35.92,43.96 35.93,43.97 C16.1 | 37.03,43.96 35.92,43.96
MISO  (via drill 0.2 pad 0.46)
  Top 0.203: U5.21 29.23,35.74 29.65,36.16 35.43,36.16 v35.66,36.39
  Top 0.305: v39.62,36.39 40.42,35.59 49.02,35.59 MISO.1
  Bottom 0.203: v35.66,36.39 v39.62,36.39
MOSI  (via drill 0.2 pad 0.46)
  Top 0.127: U5.19
  Top 0.203: U5.19 30.23,34.42 30.16,34.54 30.16,34.96 30.62,35.42 35.23,35.42 v35.43,35.21
  Top 0.305: MOSI.1 50.45,31.94 48.74,31.94 46.39,34.29 39.27,34.29 v38.35,35.21
  Bottom 0.203: v35.43,35.21 v38.35,35.21
N$1
  Top 0.406: L1.1 R9.1 8.95,60.77 8.48,61.25 5.21,61.25 C18.1
N$2
  Top 0.125: 44.88,60.75 CON4.3 | 44.88,63.88 IRIDIUM.1
  Top 0.813: 44.88,63.88 44.88,60.75
N$3
  Top 0.406: R10.2 29.56,10.1 LED2.A
N$4
  Top 0.61: SOLAR1+.1 55.24,58.71 D6.A
N$5
  Top 0.203: U5.1 35.84,27.51 X1.P$1
  Top 0.406: X1.P$1 36.96,26.52 36.96,26.45 C2.1
N$6  (via drill 0.2 pad 0.46)
  Top 0.203: U3.3 39.05,41.18 39.31,40.93 v39.31,38.58
  Top 0.813: C12.+ C11.-
  Bottom 0.406: v39.31,38.58 39.31,49.31 40.16,50.16 C12.+
N$7
  Top 0.203: U5.2 35.92,28.01 X1.P$2
  Top 0.406: X1.P$2 39.09,28.92 C4.1
N$8
  Bottom 0.813: BAT1.GND@1 BAT1.GND@2 BAT2.PWR@2 BAT2.PWR@1
N$9
  Top 0.127: 38.54,40.12 C15.2
  Top 0.203: U3.2 38.54,40.12
N$10
  Top 0.203: U3.1 38.06,41.29 C15.1
N$11
  Top 0.203: U3.7 39.56,44.58 40.01,45.02
  Top 0.406: 40.01,45.02 40.8,45.81 43.59,45.81 48.32,50.55 50.45,50.55 50.86,50.13 JP2.2
N$12
  Top 0.406: U4.2 15.08,33.06 15.91,32.23 C13.1
N$13  (via drill 0.25 pad 0.61)
  Top 0.305: U3.6 40.82,43.96 v41.37,44.51
  Top 0.406: JP1.2 50.9,52.58 50.9,51.91 50.13,51.15 47.69,51.15 43.31,46.77 v42.83,46.77
  Bottom 0.406: v41.37,44.51 41.37,45.31 v42.83,46.77
N$14
  Top 0.61: SOLAR2+.1 52.7,58.71 D5.A
N$15
  Top 0.813: BAT-.1 54.61,18.7
  Bottom 0.813: BAT-.1 54.61,10.19 BAT3.GND@1 BAT3.GND@2
N$16
  Top 0.406: CON1.VBUS 31.53,7.32 D4.A
N$17
  Top 0.406: JP2.3 49.34,46.93 R2.2
N$18
  Top 0.406: R11.2 52.39,46.93 JP2.1
N$19  (via drill 0.2, 0.2 pad 0.46)
  Top 0.305: v29.62,38.86 29.94,39.18 R15.2 31.94,39.22 Q4.1 | v33.08,16.48 33.08,18.01 Q5.C
  Bottom 0.203: 25.84,24.7 25.84,25.78 24.57,27.05 24.57,29.02 26.61,31.05 26.61,34.96 26.92,35.27 28.48,35.27 29.56,36.35 29.56,38.8 v29.62,38.86
  Bottom 0.305: 25.84,24.7 25.84,17.81 27.65,16 32.61,16 v33.08,16.48
N$20
  Top 0.305: Q5.B 34,21.33 34,21.34 34.42,21.75 R14.2
N$21
  Bottom 0.813: BAT2.GND@2 BAT2.GND@1 BAT3.PWR@1 BAT3.PWR@2
N$23
  Top 0.813: RELAY1.3 28.48,57.56 28.26,57.78 26.67,57.78 24.89,59.56 24.89,62.23 NC1.1
N$24
  Top 0.813: RELAY1.4 31.02,58.17 30.26,58.93 27.15,58.93 26,60.07 26,63.82 COM1.1
N$25
  Top 0.813: RELAY1.5 33.56,59.28 32.77,60.07 27.69,60.07 27.05,60.67 27.05,62.52 27.94,63.37 NO1.1
N$26
  Top 0.813: RELAY1.8 35.56,63.59 NO2.1
N$27
  Top 0.813: RELAY1.9 33.02,63.59 COM2.1
N$28
  Top 0.813: RELAY1.10 30.48,63.59 NC2.1
RESET_RELAY
  Top 0.61: D3.C 37.52,57.94 RELAY1.6 35.59,56.52 33.69,54.61 27.94,54.61 26.54,53.21 Q3.3
SCK  (via drill 0.2 pad 0.46)
  Top 0.203: U5.20 29.73,35.29 30.28,35.84 36.11,35.84 v36.23,35.78
  Top 0.305: 39.05,35.72 v38.99,35.78 39.88,34.89 48.2,34.89 SCK.1
  Bottom 0.203: v36.23,35.78 v38.99,35.78
SCL  (via drill 0.2 pad 0.46, 0.25 pad 0.61)
  Top 0.203: U5.32 24.25,29.51 v24.07,29.69
  Top 0.305: R8.2 11.05,29.84 10.83,30.06 10.83,30.83 | 10.83,30.83 U4.8 | v14.61,31.84 14.61,31.37 14.06,30.83 10.83,30.83
  Top 0.406: SCL.1 5.53,31.81 U4.8
  Bottom 0.305: v24.07,29.69 21.94,31.81 v14.61,31.84
SD_CS  (via drill 0.2 pad 0.46)
  Top 0.203: v34.92,33.56 34.75,33.73 U5.13
  Top 0.305: v37.85,33.56 45.59,33.56 47.82,31.34 52.39,31.34 CS.1
  Bottom 0.203: v34.92,33.56 v37.85,33.56
SDA  (via drill 0.2 pad 0.46, 0.25 pad 0.61)
  Top 0.203: U5.31 25.14,30.01 v24.77,30.39
  Top 0.305: R5.2 19.08,31.12 v19.08,33.06
  Top 0.406: U4.7 v9.65,33.06 7.25,33.05 6.86,33.05 SDA.1
  Bottom 0.305: v24.77,30.39 22.09,33.06 v19.08,33.06 v9.65,33.06
SET_RELAY
  Top 0.61: RELAY1.1 22.01,57.9 D2.C 21.14,57.86 Q2.3
SWCLK  (via drill 0.2 pad 0.46)
  Top 0.127: 31.75,26.76 U5.45
  Top 0.203: v31.75,25.3 31.75,26.76
  Bottom 0.305: SWCLK.1 49.04,19.19 43.7,19.19 43,19.89 37.17,19.89 v31.75,25.3
SWDIO  (via drill 0.2 pad 0.46)
  Top 0.127: 32.26,26.75 U5.46
  Top 0.203: v32.51,25.3 32.51,25.69 32.26,25.94 32.26,26.75
  Bottom 0.305: SWDIO.1 50.83,19.94 48.33,19.94 48.01,19.62 43.88,19.62 43.18,20.32 37.5,20.32 v32.51,25.3
VBAT  (via drill 0.25 pad 0.81)
  Top 0.813: v17.49,50.55 19.11,50.55 D1.A
  Bottom 0.813: v17.49,50.55 16.51,49.56 16.51,45.12 14.92,43.53 BAT1.PWR@2 BAT1.PWR@1
VBUS  (via drill 0.25, 0.25 pad 0.61, 0.25 pad 0.81)
  Top 0.203: U3.9 38.54,44.35 v37.78,45.12
  Top 0.305: R3.2 36.01,22.22 36.8,21.43
  Top 0.406: U2.1 15.81,25.11 15.52,25.11 15.18,24.77 15.18,23.5 15.46,23.21 U2.3 | R7.1 35.12,14.31 v35.12,15.14 | D4.C v31.5,12.32 | JP1.3 v49.34,55.02
  Top 0.61: 15.81,25.11 v15.81,27.27 17.18,27.27 C6.1 | v40.04,12.16 43.73,12.16 45.53,13.96 45.53,15.3 46.39,16.16 VBUS.1
  Top 0.813: D1.C v24.67,50.58 | v37.91,21.96 37.32,21.96 36.8,21.43 35.12,19.75 v35.12,19.05 | C17.1 35.85,53.09 v35.72,52.96 | v49.34,55.02 52.66,55.02 D5.C D6.C
  Bottom 0.406: v40.04,12.16 32.56,12.16 31.95,12.77
  Bottom 0.813: v15.81,27.27 18.8,27.27 20.54,25.53 20.54,16.29 21.68,15.14 31.97,15.14 | 37.66,52.96 37.81,52.8 37.78,52.77 v37.78,45.12 | 37.66,52.96 v35.72,52.96 27.05,52.96 v24.67,50.58 | v37.91,21.96 37.91,31.27 42.07,35.43 42.07,39.94 40.29,41.72 40.29,45.59 41.94,47.24 41.94,52.96 | 31.97,15.14 v35.12,15.14 v35.12,19.05 | v31.5,12.32 31.95,12.77 31.95,13.65 31.97,15.14 | 37.66,52.96 41.94,52.96 | 41.94,52.96 47.28,52.96 v49.34,55.02
VCC_RF
  Top 0.406: R9.2 7.94,59.09 7.94,58.93 8.1,58.77 8.98,58.77 9.41,58.34 U6.14_VCC_RF
VDDCORE1
  Top 0.127: U5.43
  Top 0.203: U5.43 30.73,25.11 31.33,24.52 C1.1

## Text on the board
Top: TOP
Bottom: BOTTOM
tPlace: 5.3 / V | 4.8V | U6 | 150 | 60mA | + | + | mA | Iridium 9603N / Beacon V5
bPlace: 30VDC 2A / MAX | 5.5V MAX | + | - | + | - | Please return to: | Iridium 9603N / Beacon V5
tNames: GND | GND